# Altium PCB SolarP.PcbDoc
Units mm, origin at the board's own origin, x right, y up, seen from the top; angles counter-clockwise.
Board outline 49.6 x 19.5 mm, 2 copper layers (Top Layer, Bottom Layer), stack 1.57 mm thick; 6 components, 5 nets, 32 pads, 40 vias.
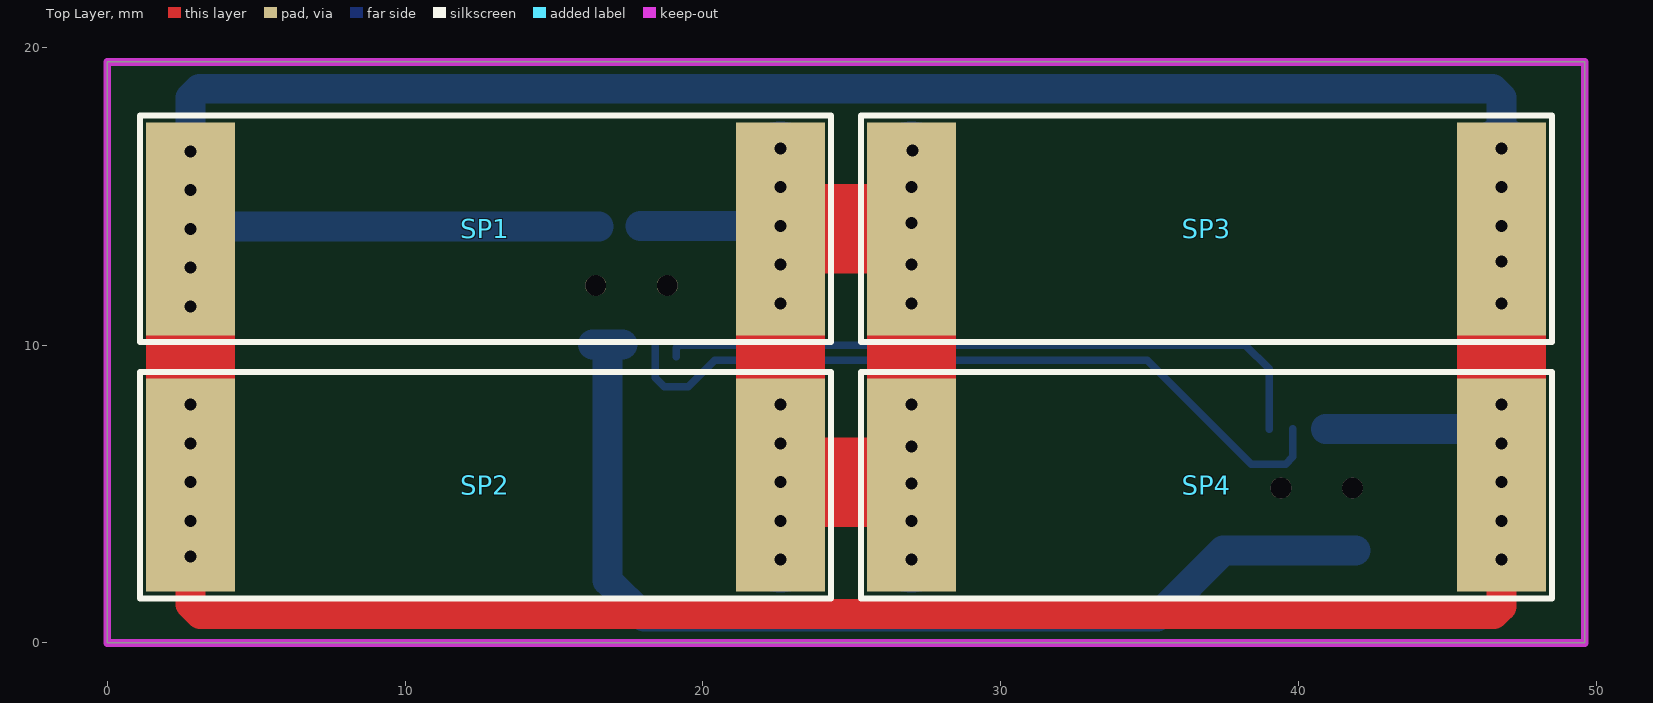
[diagram p0: Top Layer view]
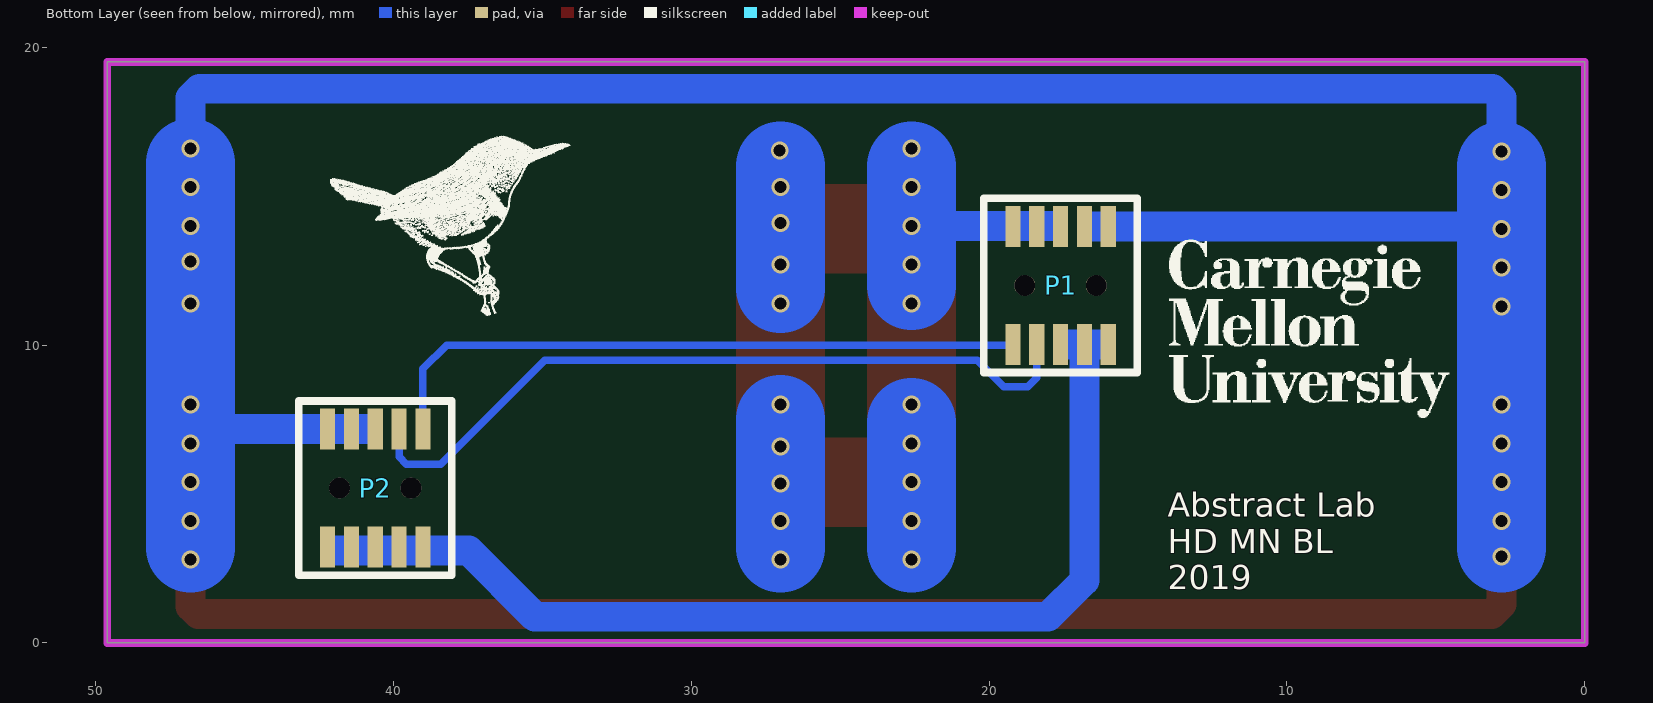
[diagram p1: Bottom Layer view, seen from below]
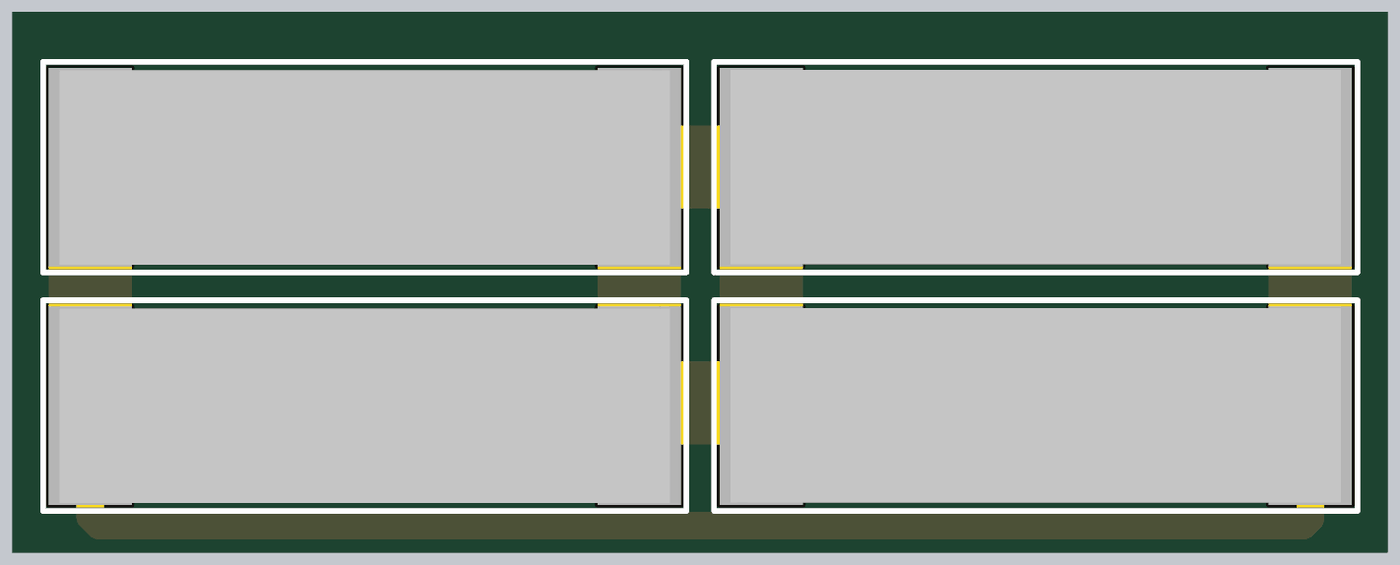
[diagram p2: 3D render of the assembled board from above, using the file's embedded part models]

## Layer stack, top to bottom
Top Solder: solder mask 0.0102, Solder Resist, Dk 3.5
Top Layer: signal copper 0.035
Dielectric 1: dielectric 1.5, FR-4, Dk 3.9
Bottom Layer: signal copper 0.035
Bottom Solder: solder mask 0.0102, Solder Resist, Dk 3.5

## Board outline
0,0 49.6,0 49.6,19.5 0,19.5

## Design rules (kind name [scope] priority, off if disabled: settings)
Clearance [All] p1: gap=0.254 ignorepadtopadclearanceinfootprint=FALSE except(0: Arc-Hole Track-Hole SMDPad-Hole THPad-Hole Via-Hole Fill-Hole Poly-Hole Region-Hole Text-Hole)
PolygonConnect [All] p1: connectstyle=Relief reliefconductorwidth=0.254 reliefentries=4 polygonreliefangle="90 Angle" airgapwidth=0.254
RoutingVias [All] p1: holewidth=0.7 width=0.9 viastyle="Through Hole" minholewidth=0.3 minwidth=0.5 maxholewidth=1 maxwidth=1.2
SolderMaskExpansion [All] p1: expansion=0.102
Width [All] p1: maxlimit=5 minlimit=0.254 preferedwidth=0.254
30 further rules are at their usual default settings.

## Components (designator, comment, footprint, x,y, rotation, side; value= is the part's Value field where it differs from the comment)
P1 "Back" CLE-105-01-X-DV#1 17.6,12 r0 bottom
P2 "Front" CLE-105-01-X-DV#2 40.6,5.2 r180 bottom
SP1 "KXOB22-01X8F" KXOB22-12X1F 12.7,13.9 r180 top
SP2 "KXOB22-01X8F" KXOB22-12X1F 12.7,5.3 r180 top
SP3 "KXOB22-01X8F" KXOB22-12X1F 36.9,13.9 r0 top
SP4 "KXOB22-01X8F" KXOB22-12X1F 36.9,5.3 r0 top

## Footprints (in the part's own frame and the unit in brackets; to place one, negate y for a bottom-side part, rotate by r counter-clockwise, add the part's x,y. Pads: shape width x height; smd on the part's side, far side on the other; paste and mask are expansions set on the pad)
CLE-105-01-X-DV#1 [mil]
  rect 20x54 smd mask+2: 1(63,-78) 2(63,78) 3(31.5,-78) 4(31.5,78) 5(0,-78) 6(0,78) 7(-31.5,-78) 8(-31.5,78) 9(-63,-78) 10(-63,78)
  round 27.56 hole 27.56 unplated: 4(-47.24,0) 4(47.24,0)
  silkscreen extent -101,-115 101,115, body extent -86,-95 86,96, height 131
CLE-105-01-X-DV#2 [mil]
  rect 20x54 smd mask+2: 1(63,-78) 2(63,78) 3(31.5,-78) 4(31.5,78) 5(0,-78) 6(0,78) 7(-31.5,-78) 8(-31.5,78) 9(-63,-78) 10(-63,78)
  round 27.56 hole 27.56 unplated: 10(-47.24,0) 10(47.24,0)
  silkscreen extent -101,-115 101,115, body extent -86,-95 86,96, height 131
KXOB22-12X1F [mm]
  rect 3x7.15 smd: 1(-9.9,0) 2(9.9,0)
  silkscreen extent -11.6,-3.8 11.6,3.8, body extent -11.01,-3.5 11.01,3.52, height 1.84

## Part data
P1: library part "Header 5X2", "Back board connector", LatestRevisionDate=17-Jul-2002, LatestRevisionNote="Re-released for DXP Platform.", Publisher="Altium Limited", System=Connector
P2: library part "Header 5X2", "Front board connector", LatestRevisionDate=17-Jul-2002, LatestRevisionNote="Re-released for DXP Platform.", Publisher="Altium Limited", System=Connector
SP1 SP2 SP3 SP4: library part KXOB22-12X1F, "Monocrystalline Solar Cell 22% 2-Pin SMD", Manufacturer_Name="IXYS SEMICONDUCTOR", Datasheet Link=http://ixapps.ixys.com/DataSheet/KXOB22-12X1F_Nov16.pdf, Height=6.1mm, Manufacturer_Part_Number=KXOB22-12X1F

## Via types
v1: diameter 0.6, hole 0.4, Top Layer to Bottom Layer, tented both sides, 40 vias

## Nets (pads, with @x,y where several pads share a name; then routed paths per layer and width w, separated by ;. In a path a pad name is that pad's centre, name@x,y a point inside that pad or via, vN(x,y) a via of type N, cw(c..) or ccw(c..) an arc to the next point about the centre after c; other vN are vias at no path point)
GND: P1.7 P1.9 P2.6 P2.8 P2.10@42.2,7.181 SP1.2 SP2.2 SP3.2 SP4.2 | length 161.9
  Top Layer w0.254: v1(2.8,2.9) v1(2.8,4.1) SP2.2 ; v1(46.8,2.8) v1(46.8,4.1) SP4.2
  Top Layer w1: v1(2.8,2.9) 2.8,1.3 3.129,0.971 46.542,0.971 46.8,1.229 v1(46.8,2.8)
  Top Layer w3: SP2.2 v1(2.8,5.4) v1(2.8,6.7) v1(2.8,8) v1(2.8,11.3) v1(2.8,12.6) ; SP4.2 v1(46.8,5.4) v1(46.8,6.7) v1(46.8,8) v1(46.8,11.4) v1(46.8,12.8) SP3.2
  Bottom Layer w0.254: v1(2.8,11.3) 3.519,10.581 ; 45.981,7.181 v1(46.8,8)
  Bottom Layer w1: v1(2.8,16.5) 2.8,18.3 3.1,18.6 46.5,18.6 46.8,18.3 v1(46.8,16.6) ; 3.519,13.981 P1.9 16.5,13.981 ; 40.9,7.181 P2.8 42.2,7.181 45.981,7.181
  Bottom Layer w3: 2.8,3.2 v1(2.8,4.1) v1(2.8,5.4) v1(2.8,6.7) v1(2.8,8) v1(2.8,11.3) v1(2.8,12.6) v1(2.8,13.9) v1(2.8,15.2) 2.8,16 ; 46.8,3.2 v1(46.8,4.1) v1(46.8,5.4) v1(46.8,6.7) v1(46.8,8) v1(46.8,11.4) v1(46.8,12.8) v1(46.8,14) v1(46.8,15.3) 46.8,16.1
MSP_RST: P1.4@18.4,10.019 P2.4 | length 25.5
  Bottom Layer w0.254: P1.4@18.4,10.019 18.4,8.9 18.7,8.6 19.5,8.6 20.392,9.492 34.908,9.492 38.4,6 39.551,6 39.8,6.249 P2.4
TPS_EN: P1.2 P2.2 | length 22.6
  Bottom Layer w0.254: P1.2@19.1,9.6 19.1,9.9 19.2,10 19.6,10 38.2,10 39,9.2 P2.2
V_HARVEST: P1.1 P1.3 P1.5 SP1.1 SP2.1 SP3.1 SP4.1 | length 47.2
  Top Layer w3: v1(22.6,5.4) 26.9,5.4 SP4.1 v1(27,5.35) v1(27,6.6) v1(27,8) v1(27,11.4) v1(27,12.7) SP3.1 SP1.1 v1(22.6,12.7) v1(22.6,11.4) v1(22.6,8) v1(22.6,6.7) v1(22.6,5.4)
  Bottom Layer w1: 17.9,14 18.4,14 19.2,14 v1(22.6,14)
  Bottom Layer w3: 22.6,3.2 v1(22.6,4.1) v1(22.6,5.4) v1(22.6,6.7) 22.6,7.4 ; 22.6,12 v1(22.6,12.7) v1(22.6,14) v1(22.6,15.3) 22.6,16 ; 27,3.2 v1(27,4.1) v1(27,5.35) v1(27,6.6) 27,7.5 ; 27,11.9 v1(27,12.7) v1(27,14.1) v1(27,15.3) 27,16
  other v1: 22.6,2.8 27,2.8 27.025,16.525 22.6,16.6
VCC: P1.6 P1.8 P1.10 P2.1 P2.3 P2.5 P2.7 P2.9 | length 35.4
  Bottom Layer w1: 16.3,10.019 P1.8 ; 17.3,10.019 P1.8 ; 41.9,3.1 41.4,3.1 40.6,3.1 39.8,3.1 39,3.1 37.462,3.1 35.243,0.881 18.019,0.881 16.8,2.1 P1.8
pads on no net: P1.4@16.4,12 P1.4@18.8,12 P2.10@39.4,5.2 P2.10@41.8,5.2

## Keep-outs
Keep-Out Layer:
  the board outline again, w0.254

## Silkscreen, mask and mechanical layers (free items; w line width, h text height)
Bottom Overlay:
  drawing of 8989 lines, arcs and shapes, not listed
  text "Abstract Lab  / HD MN BL  / 2019" at 14,1.8 h0.81

## Text inside footprints (layer, text, board x,y; h text height)
P1: Mechanical 1 "J1" at 17.161,12.45 h0.75 r180
P2: Mechanical 1 "J1" at 41.039,4.75 h0.75